# Altium PCB Motherboard.PcbDoc (part 1 of 2)
Units mil, origin at the board's own origin, x right, y up, seen from the top; angles counter-clockwise.
Board outline 12000 x 6000 mil, 2 copper layers (Top Layer, Bottom Layer); 292 components, 245 nets, 1024 pads, 7 vias.
Unrouted connection lines stored in the file: 549.
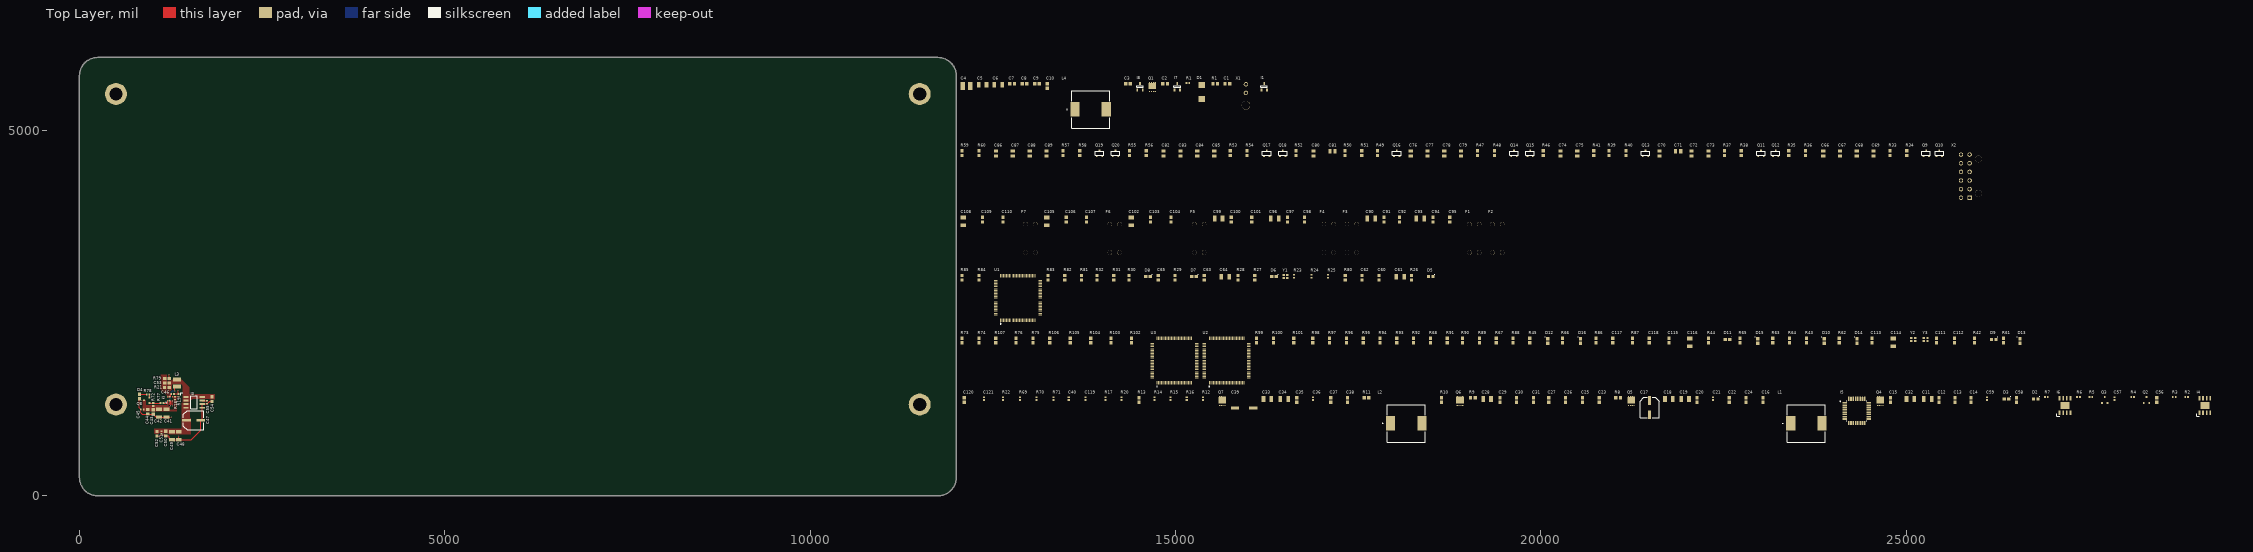
[diagram p0: Top Layer view]
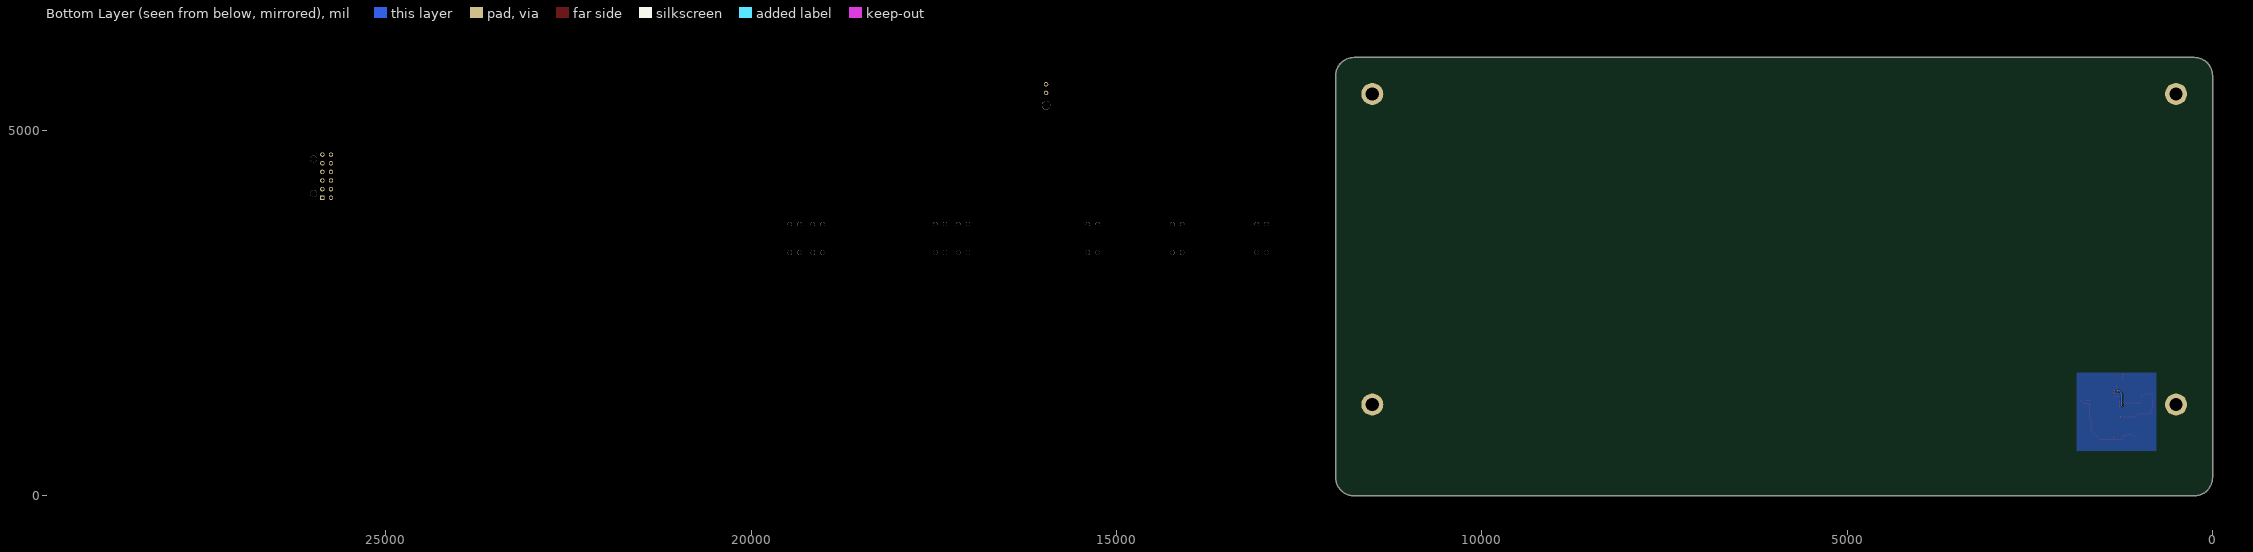
[diagram p1: Bottom Layer view, seen from below]

## Layer stack, top to bottom
Top Solder: solder mask 0.4, Solder Resist, Dk 3.5
Top Layer: signal copper 1.4
Dielectric 1: dielectric 12.6, FR-4, Dk 4.8
Bottom Layer: signal copper 1.4
Bottom Solder: solder mask 0.4, Solder Resist, Dk 3.5

## Board outline
0,250 0,5750 cw(c250,5750) 250,6000 11750,6000 cw(c11750,5750) 12000,5750 12000,250 cw(c11750,250) 11750,0 250,0 cw(c250,250)

## Design rules (kind name [scope] priority, off if disabled: settings)
Clearance [All] p1: gap=10 ignorepadtopadclearanceinfootprint=FALSE except(0: Arc-Hole Track-Hole SMDPad-Hole THPad-Hole Via-Hole Fill-Hole Poly-Hole Region-Hole Text-Hole)
PolygonConnect [All] p1: connectstyle=Direct reliefconductorwidth=10 reliefentries=4 polygonreliefangle="90 Angle" airgapwidth=10
RoomDefinition 3.3V_Converter [False] p1: confinementstyle=ConfineIn formatcopy=TRUE lockcomponents=FALSE outline 735,1725 1905,1725 1905,585 735,585
RoomDefinition Power_Section [InComponentClass('Power_Section')] p2: confinementstyle=ConfineIn formatcopy=TRUE lockcomponents=FALSE outline 12045,4905 16275,4905 16275,5775 12045,5775
RoomDefinition Mosfet_Board [InComponentClass('Mosfet_Board')] p3: confinementstyle=ConfineIn formatcopy=TRUE lockcomponents=FALSE outline 12045,3995 26105,3995 26105,4855 12045,4855
RoomDefinition FuseCircuit [InComponentClass('FuseCircuit')] p4: confinementstyle=ConfineIn formatcopy=TRUE lockcomponents=FALSE outline 12045,3205 19545,3205 19545,3945 12045,3945
RoomDefinition Fuse_Science_PDB_MCU [InComponentClass('Fuse_Science_PDB_MCU')] p5: confinementstyle=ConfineIn formatcopy=TRUE lockcomponents=FALSE outline 12045,2340 18565,2340 18565,3150 12045,3150
RoomDefinition Brushed_Motor_MCU [InComponentClass('Brushed_Motor_MCU')] p6: confinementstyle=ConfineIn formatcopy=TRUE lockcomponents=FALSE outline 12045,1480 26700,1480 26700,2290 12045,2290
RoomDefinition 5V_12V_Converter [InComponentClass('5V_12V_Converter')] p7: confinementstyle=ConfineIn formatcopy=TRUE lockcomponents=FALSE outline 12075,606.5 29195,606.5 29195,1476.5 12075,1476.5
RoutingVias [All] p1: holewidth=28 width=50 viastyle="Through Hole" minholewidth=28 minwidth=50 maxholewidth=28 maxwidth=50
SolderMaskExpansion [All] p1: expansion=4 istentingtop=FALSE
Width [All] p1: maxlimit=10 minlimit=5 preferedwidth=10 bottomlayer_minwidth=10 minimp=50.000000 maximp=50.000000 favimp=50.000000
30 further rules are at their usual default settings.

## Classes and differential pairs
component class Power_Section: C1 C2 C3 C4 C5 C6 C7 C8 C9 C10 D1 I1 I7 I8 L4 Q1 R1 X1
component class Mosfet_Board: C66 C67 C68 C69 C70 C71 C72 C73 C74 C75 C76 C77 C78 C79 C80 C81 C82 C83 C84 C85 C86 C87 C88 C89 Q9 Q10 Q11 Q12 Q13 Q14 Q15 Q16 Q17 Q18 Q19 Q20 R33 R34 R35 R36 R37 R38 R39 R40 R41 R46 R47 R48 R49 R50 R51 R52 R53 R54 R55 R56 R57 R58 R59 R60 X2
component class FuseCircuit: C90 C91 C92 C93 C94 C95 C96 C97 C98 C99 C100 C101 C102 C103 C104 C105 C106 C107 C108 C109 C110 F1 F2 F3 F4 F5 F6 F7
component class Fuse_Science_PDB_MCU: C60 C61 C62 C63 C64 C65 D5 D6 D7 D8 R23 R24 R25 R26 R27 R28 R29 R30 R31 R32 R80 R81 R82 R83 R84 R85 U1 Y1
component class Brushed_Motor_MCU: C111 C112 C113 C114 C115 C116 C117 C118 D9 D10 D11 D12 D13 D14 D15 D16 R42 R43 R44 R45 R61 R62 R63 R64 R65 R66 R67 R68 R73 R74 R75 R76 R86 R87 R88 R89 R90 R91 R92 R93 R94 R95 R96 R97 R98 R99 R100 R101 R102 R103 R104 R105 R106 R107 U2 U3 Y2 Y3
component class 5V_12V_Converter: C11 C12 C13 C14 C15 C16 C17 C18 C19 C20 C21 C22 C23 C24 C25 C26 C27 C28 C29 C30 C31 C32 C33 C34 C35 C36 C37 C38 C39 C40 C56 C57 C58 C59 C119 C120 C121 D2 D3 I4 I5 I6 L1 L2 Q2 Q3 Q4 Q5 Q6 Q7 R2 R3 R4 R5 R6 R7 R8 R9 R10 R11 R12 R13 R14 R15 R16 R17 R20 R22 R69 R70 R71
component class 3.3V_Converter: C41 C42 C43 C44 C45 C46 C47 C48 C49 C50 C51 C52 C53 C54 C55 D4 I2 I3 L3 Q8 R18 R19 R21 R72 R77 R78 R79

## Components (designator, comment, footprint, x,y, rotation, side; value= is the part's Value field where it differs from the comment)
C1 "UMK107AB7105KA-T" CAP-0603 15710,5640 r0 top
C2 "UMK107AB7105KA-T" CAP-0603 14860,5640 r0 top
C3 "UMK107AB7105KA-T" CAP-0603 14350,5640 r0 top
C4 "GRM32EC72A106KE05L" CAP-1210 12140,5610 r0 top
C5 "CAP-1U-0001" "CAP-1206 - duplicate" 12355,5625 r0 top
C6 "CAP-1U-0001" "CAP-1206 - duplicate" 12570,5625 r0 top
C7 "CC0603KRX7R0BB104" CAP-0603 12765,5640 r0 top
C8 "C1608C0G2A103J080AC" CAP-0603 12935,5640 r0 top
C9 "CAP-1N-0001" CAP-0603 13105,5640 r0 top
C10 "CC0603CRNPO0BN4R7" CAP-0603 13245,5610 r90 top
C11 "CAP-1U-0001" "CAP-1206 - duplicate" 25290,1326.5 r0 top
C12 "CC0603KRX7R0BB104" CAP-0603 25450,1311.5 r90 top
C13 "C1608C0G2A103J080AC" CAP-0603 25670,1311.5 r90 top
C14 "CAP-1N-0001" CAP-0603 25890,1311.5 r90 top
C15 "TMK107BBJ475KA-T" CAP-0603 24785,1311.5 r90 top
C16 "CC0603KRX7R9BB333" CAP-0603 23040,1311.5 r90 top
C17 "UUD1C221MCL1GS" ELEC-220U-0001 21490,1206.5 r0 top
C18 "CL31B106KBHNNNE" CAP-1206 21755,1326.5 r0 top
C19 "CL31B106KBHNNNE" CAP-1206 21975,1326.5 r0 top
C20 "CC0603KRX7R0BB104" CAP-0603 22140,1311.5 r90 top
C21 "CC0402KRX7R0BB103" CAP-0402 22360,1331.5 r90 top
C22 "CAP-1N-0001" CAP-0603 22580,1311.5 r90 top
C23 "CC0603KRX7R0BB104" CAP-0603 20800,1311.5 r90 top
C24 "CC0603KRX7R0BB104" CAP-0603 22810,1311.5 r90 top
C25 "CC0603KRX7R9BB333" CAP-0603 20570,1311.5 r90 top
C26 "CC0603KRX7R0BB104" CAP-0603 20340,1311.5 r90 top
C27 "CC0603KRX7R0BB104" CAP-0603 20110,1311.5 r90 top
C28 "CAP-1U-0001" "CAP-1206 - duplicate" 19260,1326.5 r0 top
C29 "CC0603KRX7R0BB104" CAP-0603 19440,1311.5 r90 top
C30 "C1608C0G2A103J080AC" CAP-0603 19670,1311.5 r90 top
C31 "CAP-1N-0001" CAP-0603 19900,1311.5 r90 top
C32 "CAP-1U-0001" "CAP-1206 - duplicate" 25055,1326.5 r0 top
C33 "CL31B106KBHNNNE" CAP-1206 16260,1326.5 r0 top
C34 "CL31B106KBHNNNE" CAP-1206 16490,1326.5 r0 top
C35 "CC0603KRX7R0BB104" CAP-0603 16660,1311.5 r90 top
C36 "CC0402KRX7R0BB103" CAP-0402 16885,1331.5 r90 top
C37 "CAP-1N-0001" CAP-0603 17125,1311.5 r90 top
C38 "CC0603KRX7R0BB104" CAP-0603 17355,1311.5 r90 top
C39 "25THV220M8X10.5" ELEC-220U-0002 15940,1201.5 r0 top
C40 "CC0402BRNPO9BN2R0" CAP-0402 13540,1331.5 r90 top
C41 "CL31B106KBHNNNE" CAP-1206 1190,1129.13 r270 top
C42 "CL31B106KBHNNNE" CAP-1206 1090,1129.13 r270 top
C43 "CC0603KRX7R0BB104" CAP-0603 1010,1148.5 r270 top
C44 "C1608C0G2A103J080AC" CAP-0603 935,1151.5 r270 top
C45 "CC0402KPX7R9BB102" CAP-0402 860.32,1185 r180 top
C46 "CC0402KRX7R0BB103" CAP-0402 1274.68,1395 r0 top
C47 "UUD1C221MCL1GS" ELEC-220U-0001 1563.43,1035 r90 top
C48 "CL31B106KBHNNNE" CAP-1206 1360,824.13 r270 top
C49 "CL31B106KBHNNNE" CAP-1206 1265,824.13 r270 top
C50 "CC0603KRX7R0BB104" CAP-0603 1180,851.5 r270 top
C51 "CC0402KRX7R0BB103" CAP-0402 1125,864.68 r270 top
C52 "CAP-1N-0001" CAP-0603 1060,850 r270 top
C53 "0603N100J500CT" CAP-0603 1198.5,1545 r0 top
C54 "CC0603KRX7R0BB104" CAP-0603 1815,1323.5 r270 top
C55 "CC0402KPX7R9BB102" CAP-0402 1745,1280.32 r270 top
C56 "UMK107AB7105KA-T" CAP-0603 28430,1311.5 r90 top
C57 "CC0402KPX7R9BB102" CAP-0402 27850,1331.5 r90 top
C58 "UMK107AB7105KA-T" CAP-0603 26510,1311.5 r90 top
C59 "CC0402KPX7R9BB102" CAP-0402 26105,1331.5 r90 top
C60 "C1608C0G2A103J080AC" CAP-0603 17785,2985 r90 top
C61 "CAP-1U-0001" "CAP-1206 - duplicate" 18070,3000 r0 top
C62 "CC0603DRNPO9BN8R0" CAP-0603 17555,2985 r90 top
C63 "C1608C0G2A103J080AC" CAP-0603 15395,2985 r90 top
C64 "CAP-1U-0001" "CAP-1206 - duplicate" 15675,3000 r0 top
C65 "CC0603DRNPO9BN8R0" CAP-0603 14765,2985 r90 top
C66 "MCS1802GS-20-Z" CAP-0805 23865,4685 r90 top
C67 "MCS1802GS-20-Z" CAP-0805 24095,4685 r90 top
C68 "MCS1802GS-20-Z" CAP-0805 24325,4685 r90 top
C69 "MCS1802GS-20-Z" CAP-0805 24555,4685 r90 top
C70 "MCS1802GS-20-Z" CAP-0805 21625,4685 r90 top
C71 "MCS1802GS-20-Z" CAP-0805 21880,4715 r0 top
C72 "MCS1802GS-20-Z" CAP-0805 22065,4685 r90 top
C73 "MCS1802GS-20-Z" CAP-0805 22295,4685 r90 top
C74 "MCS1802GS-20-Z" CAP-0805 20270,4685 r90 top
C75 "MCS1802GS-20-Z" CAP-0805 20500,4685 r90 top
C76 "MCS1802GS-20-Z" CAP-0805 18220,4685 r90 top
C77 "MCS1802GS-20-Z" CAP-0805 18450,4685 r90 top
C78 "MCS1802GS-20-Z" CAP-0805 18680,4685 r90 top
C79 "MCS1802GS-20-Z" CAP-0805 18910,4685 r90 top
C80 "MCS1802GS-20-Z" CAP-0805 16890,4685 r90 top
C81 "MCS1802GS-20-Z" CAP-0805 17150,4715 r0 top
C82 "MCS1802GS-20-Z" CAP-0805 14835,4685 r90 top
C83 "MCS1802GS-20-Z" CAP-0805 15070,4685 r90 top
C84 "MCS1802GS-20-Z" CAP-0805 15300,4685 r90 top
C85 "MCS1802GS-20-Z" CAP-0805 15530,4685 r90 top
C86 "MCS1802GS-20-Z" CAP-0805 12545,4685 r90 top
C87 "MCS1802GS-20-Z" CAP-0805 12775,4685 r90 top
C88 "MCS1802GS-20-Z" CAP-0805 13005,4685 r90 top
C89 "MCS1802GS-20-Z" CAP-0805 13235,4685 r90 top
C90 "CL31B105KCHNNNE" "CAP-1206 - duplicate" 17675,3795 r0 top
C91 "CC0603KRX7R0BB104" CAP-0603 17855,3780 r90 top
C92 "C1608C0G2A103J080AC" CAP-0603 18065,3780 r90 top
C93 "CL31B105KCHNNNE" "CAP-1206 - duplicate" 18345,3795 r0 top
C94 "CC0603KRX7R0BB104" CAP-0603 18525,3780 r90 top
C95 "C1608C0G2A103J080AC" CAP-0603 18755,3780 r90 top
C96 "CL31B105KCHNNNE" "CAP-1206 - duplicate" 16355,3795 r0 top
C97 "CC0603KRX7R0BB104" CAP-0603 16535,3780 r90 top
C98 "C1608C0G2A103J080AC" CAP-0603 16765,3780 r90 top
C99 "CL31B105KCHNNNE" "CAP-1206 - duplicate" 15585,3795 r0 top
C100 "CC0603KRX7R0BB104" CAP-0603 15765,3780 r90 top
C101 "C1608C0G2A103J080AC" CAP-0603 16045,3780 r90 top
C102 "CL31B105KCHNNNE" "CAP-1206 - duplicate" 14395,3750 r90 top
C103 "CC0603KRX7R0BB104" CAP-0603 14660,3780 r90 top
C104 "C1608C0G2A103J080AC" CAP-0603 14940,3780 r90 top
C105 "CL31B105KCHNNNE" "CAP-1206 - duplicate" 13240,3750 r90 top
C106 "CC0603KRX7R0BB104" CAP-0603 13505,3780 r90 top
C107 "C1608C0G2A103J080AC" CAP-0603 13785,3780 r90 top
C108 "CL31B105KCHNNNE" "CAP-1206 - duplicate" 12095,3750 r90 top
C109 "CC0603KRX7R0BB104" CAP-0603 12360,3780 r90 top
C110 "C1608C0G2A103J080AC" CAP-0603 12640,3780 r90 top
C111 "CC0603DRNPO9BN8R0" CAP-0603 25415,2125 r90 top
C112 "CC0603DRNPO9BN8R0" CAP-0603 25665,2125 r90 top
C113 "C1608C0G2A103J080AC" CAP-0603 24535,2125 r90 top
C114 "CAP-1U-0001" "CAP-1206 - duplicate" 24825,2095 r90 top
C115 "C1608C0G2A103J080AC" CAP-0603 21755,2125 r90 top
C116 "CAP-1U-0001" "CAP-1206 - duplicate" 22040,2095 r90 top
C117 "CC0603DRNPO9BN8R0" CAP-0603 20985,2125 r90 top
C118 "CC0603DRNPO9BN8R0" CAP-0603 21485,2125 r90 top
C119 "CC0402BRNPO9BN2R0" CAP-0402 13770,1331.5 r90 top
C120 "06035A4R7DAT2A" CAP-0603 12110,1311.5 r90 top
C121 "GRM1557U1A302JA01D" CAP-0402 12380,1331.5 r90 top
D1 "SMBJE43CAH" "DO-214AA (SMBJ)" 15360,5525 r90 top
D2 "150060AS75000" LED-0603 26775,1326.5 r0 top
D3 "150060AS75000" LED-0603 26375,1326.5 r0 top
D4 "150060AS75000" LED-0603 820,1360 r270 top
D5 "150060AS75000" LED-0603 18495,3000 r0 top
D6 "150060AS75000" LED-0603 16350,3000 r0 top
D7 "150060AS75000" LED-0603 15255,3000 r0 top
D8 "150060AS75000" LED-0603 14625,3000 r0 top
D9 "150060AS75000" LED-0603 26200,2140 r0 top
D10 "150060AS75000" LED-0603 23880,2120 r90 top
D11 "150060AS75000" LED-0603 22555,2140 r0 top
D12 "150060AS75000" LED-0603 20095,2120 r90 top
D13 "150060AS75000" LED-0603 26560,2120 r90 top
D14 "150060AS75000" LED-0603 24330,2120 r90 top
D15 "150060AS75000" LED-0603 22970,2120 r90 top
D16 "150060AS75000" LED-0603 20545,2120 r90 top
F1 "3568" FUSE-ATM-0001 19090,3525 r90 top
F2 "3568" FUSE-ATM-0001 19405,3525 r90 top
F3 "3568" FUSE-ATM-0001 17415,3525 r90 top
F4 "3568" FUSE-ATM-0001 17100,3525 r90 top
F5 "3568" FUSE-ATM-0001 15325,3525 r90 top
F6 "3568" FUSE-ATM-0001 14170,3525 r90 top
F7 "3568" FUSE-ATM-0001 13015,3525 r90 top
I1 "MCP9701T-E/TT" IC-TEMP-0001 16215,5600 r0 top
I2 "MP2182GTL-P" IC-SOT583 1240.63,1327.44 r0 top
I3 "ACS722LLCTR-10AU-T" IC-CURRENT-0001 1570.24,1280 r270 top
I4 "MCS1802GS-20-Z" IC-BUCK-8SOIC 29090,1236.5 r0 top
I5 "MAX17559ACJ+" IC-BUCK-TQFP-7x7 24325,1161.5 r0 top
I6 "MCS1802GS-20-Z" IC-BUCK-8SOIC 27175,1236.5 r0 top
I7 "MCP9701T-E/TT" IC-TEMP-0001 15025,5600 r0 top
I8 "MCP9701T-E/TT" IC-TEMP-0001 14515,5600 r0 top
L1 "SRP1265A-3R3M" PWRIND-3.3U-0002 23635,991.5 r0 top
L2 "SRP1265A-1R5M" PWRIND-1.5U-0002 18160,991.5 r0 top
L3 "SRP3212-1R5M" IND-1210 1335,1497.48 r90 top
L4 "SRP1265A-1R5M" PWRIND-1.5U-0002 13840,5290 r0 top
Q1 "TPN11006PL,LQ" NMOS-8TSON 14685,5595 r0 top
Q2 "BC847C,235" NPN-420-0001 28290,1311.5 r0 top
Q3 "BC847C,235" NPN-420-0001 27720,1311.5 r0 top
Q4 "TPN11006PL,LQ" NMOS-8TSON 24645,1296.5 r0 top
Q5 "TPN11006PL,LQ" NMOS-8TSON 21240,1296.5 r0 top
Q6 "TPN11006PL,LQ" NMOS-8TSON 18895,1296.5 r0 top
Q7 "TPN11006PL,LQ" NMOS-8TSON 15640,1296.5 r0 top
Q8 "BC847C,235" NPN-420-0001 920.63,1307.4 r90 top
Q9 "YJL3404A" NMOS-SOT23-3 25275,4690 r0 top
Q10 "YJL3404A" NMOS-SOT23-3 25455,4690 r0 top
Q11 "YJL3404A" NMOS-SOT23-3 23015,4690 r0 top
Q12 "YJL3404A" NMOS-SOT23-3 23215,4690 r0 top
Q13 "YJL3404A" NMOS-SOT23-3 21435,4690 r0 top
Q14 "YJL3404A" NMOS-SOT23-3 19635,4690 r0 top
Q15 "YJL3404A" NMOS-SOT23-3 19855,4690 r0 top
Q16 "YJL3404A" NMOS-SOT23-3 18030,4690 r0 top
Q17 "YJL3404A" NMOS-SOT23-3 16250,4690 r0 top
Q18 "YJL3404A" NMOS-SOT23-3 16470,4690 r0 top
Q19 "YJL3404A" NMOS-SOT23-3 13960,4690 r0 top
Q20 "YJL3404A" NMOS-SOT23-3 14180,4690 r0 top
R1 "ERJ-3EKF2003V" RES-0603 15545,5640 r0 top
R1 "AF0402FR-07100KL" RES-0402 15170,5650 r0 top
R2 "RC0402FR-0710KL" RES-0402 28840,1351.5 r0 top
R3 "RC0402FR-0710KL" RES-0402 28670,1351.5 r0 top
R4 "RC0402JR-071KP" RES-0402 28100,1351.5 r0 top
R5 "RC0402JR-071KP" RES-0402 27530,1351.5 r0 top
R6 "AC0402FR-07220RL" RES-0402 27360,1351.5 r0 top
R7 "AC0402FR-07220RL" RES-0402 26920,1351.5 r0 top
R8 "ARG03FTC5761" RES-0603 21060,1341.5 r0 top
R9 "RC0603FR-07121KL" RES-0603 19070,1341.5 r0 top
R10 "RC0603FR-07165KL" RES-0603 18640,1311.5 r90 top
R11 "RC0603FR-07240KL" RES-0603 17615,1341.5 r0 top
R12 "AC0402FR-075K6L" RES-0402 15375,1331.5 r90 top
R13 "RC0603FR-0710KP" RES-0603 14500,1311.5 r90 top
R14 "AF0402FR-07100KL" RES-0402 14715,1331.5 r90 top
R15 "RC0402FR-0710KL" RES-0402 14935,1331.5 r90 top
R16 "RC0402FR-0710KL" RES-0402 15155,1331.5 r90 top
R17 "RMCF0402FT78K7" RES-0402 14040,1331.5 r90 top
R18 "RC0402JR-071KP" RES-0402 1310,1335.32 r90 top
R19 "RC0402JR-071KP" RES-0402 1355,1374.68 r90 top
R20 "RMCF0402JT75K0" RES-0402 14260,1331.5 r90 top
R21 "ERJ-3EKF2003V" RES-0603 1196.5,1485 r180 top
R22 "RC0402FR-072KP" RES-0402 12640,1331.5 r90 top
R23 "RC0402FR-0710KL" RES-0402 16625,3005 r90 top
R24 "RC0402FR-0710KL" RES-0402 16860,3005 r90 top
R25 "RC0402FR-0710KL" RES-0402 17090,3005 r90 top
R26 "AC0603FR-10100RL" RES-0603 18230,2985 r90 top
R27 "AC0603FR-10100RL" RES-0603 16085,2985 r90 top
R28 "RMCF0603FT1M00" RES-0603 15855,2985 r90 top
R29 "AC0603FR-10100RL" RES-0603 14995,2985 r90 top
R30 "AC0603FR-10100RL" RES-0603 14365,2985 r90 top
R31 "AF0603FR-074K7L" RES-0603 14155,2985 r90 top
R32 "AF0603FR-074K7L" RES-0603 13925,2985 r90 top
R33 "RC0603FR-0733RP" RES-0603 24780,4690 r90 top
R34 "RC0603FR-0733RP" RES-0603 25010,4690 r90 top
R35 "RC0603FR-0710KP" RES-0603 23395,4690 r90 top
R36 "RC0603FR-0710KP" RES-0603 23625,4690 r90 top
R37 "RC0603FR-0733RP" RES-0603 22515,4690 r90 top
R38 "RC0603FR-0733RP" RES-0603 22745,4690 r90 top
R39 "RC0603FR-0710KP" RES-0603 20935,4690 r90 top
R40 "RC0603FR-0710KP" RES-0603 21165,4690 r90 top
R41 "RC0603FR-0733RP" RES-0603 20725,4690 r90 top
R42 "AC0603FR-10100RL" RES-0603 25935,2125 r90 top
R43 "AC0603FR-10100RL" RES-0603 23635,2125 r90 top
R44 "AC0603FR-10100RL" RES-0603 22295,2125 r90 top
R45 "AC0603FR-10100RL" RES-0603 19850,2125 r90 top
R46 "RC0603FR-0710KP" RES-0603 20035,4690 r90 top
R47 "RC0603FR-0733RP" RES-0603 19135,4690 r90 top
R48 "RC0603FR-0733RP" RES-0603 19365,4690 r90 top
R49 "RC0603FR-0733RP" RES-0603 17765,4690 r90 top
R50 "RC0603FR-0710KP" RES-0603 17320,4690 r90 top
R51 "RC0603FR-0710KP" RES-0603 17550,4690 r90 top
R52 "RC0603FR-0710KP" RES-0603 16650,4690 r90 top
R53 "RC0603FR-0733RP" RES-0603 15750,4690 r90 top
R54 "RC0603FR-0733RP" RES-0603 15980,4690 r90 top
R55 "RC0603FR-0710KP" RES-0603 14370,4690 r90 top
R56 "RC0603FR-0710KP" RES-0603 14600,4690 r90 top
R57 "RC0603FR-0733RP" RES-0603 13460,4690 r90 top
R58 "RC0603FR-0733RP" RES-0603 13690,4690 r90 top
R59 "RC0603FR-0710KP" RES-0603 12080,4690 r90 top
R60 "RC0603FR-0710KP" RES-0603 12310,4690 r90 top
R61 "AC0603FR-10100RL" RES-0603 26335,2125 r90 top
R62 "AC0603FR-10100RL" RES-0603 24085,2125 r90 top
R63 "RMCF0603FT1M00" RES-0603 23175,2125 r90 top
R64 "RMCF0603FT1M00" RES-0603 23405,2125 r90 top
R65 "AC0603FR-10100RL" RES-0603 22725,2125 r90 top
R66 "AC0603FR-10100RL" RES-0603 20300,2125 r90 top
R67 "RMCF0603ZT0R00" RES-0603 19390,2125 r90 top
R68 "RMCF0603ZT0R00" RES-0603 18490,2125 r90 top
R69 "CRCW04027K15FKED" RES-0402 12870,1331.5 r90 top
R70 "RC0402JR-071KP" RES-0402 13100,1331.5 r90 top
R71 "RC0402JR-071KP" RES-0402 13330,1331.5 r90 top
R72 "AF0402FR-07100KL" RES-0402 1010,1250 r90 top
R73 "AF0603FR-074K7L" RES-0603 12080,2125 r90 top
R74 "AF0603FR-074K7L" RES-0603 12310,2125 r90 top
R75 "AF0603FR-074K7L" RES-0603 13050,2125 r90 top
R76 "AF0603FR-074K7L" RES-0603 12820,2125 r90 top
R77 "RC0402FR-0710KL" RES-0402 1130,1270 r180 top
R78 "RC0402JR-0733RP" RES-0402 940.32,1390 r180 top
R79 "RMCF0603FT44K2" RES-0603 1198.5,1605 r0 top
R80 "RMCF0603ZT0R00" RES-0603 17325,2985 r90 top
R81 "RMCF0603ZT0R00" RES-0603 13715,2985 r90 top
R82 "RMCF0603ZT0R00" RES-0603 13485,2985 r90 top
R83 "RMCF0603ZT0R00" RES-0603 13255,2985 r90 top
R84 "RMCF0603ZT0R00" RES-0603 12310,2985 r90 top
R85 "RMCF0603ZT0R00" RES-0603 12080,2985 r90 top
R86 "RMCF0603ZT0R00" RES-0603 20755,2125 r90 top
R87 "RMCF0603ZT0R00" RES-0603 21255,2125 r90 top
R88 "AF0603FR-074K7L" RES-0603 19620,2125 r90 top
R89 "AF0603FR-074K7L" RES-0603 19160,2125 r90 top
R90 "AF0603FR-074K7L" RES-0603 18930,2125 r90 top
R91 "AF0603FR-074K7L" RES-0603 18720,2125 r90 top
R92 "RMCF0603ZT0R00" RES-0603 18260,2125 r90 top
R93 "RMCF0603ZT0R00" RES-0603 18030,2125 r90 top
R94 "RMCF0603ZT0R00" RES-0603 17800,2125 r90 top
R95 "RMCF0603ZT0R00" RES-0603 17570,2125 r90 top
R96 "RMCF0603ZT0R00" RES-0603 17340,2125 r90 top
R97 "RMCF0603ZT0R00" RES-0603 17110,2125 r90 top
R98 "RMCF0603ZT0R00" RES-0603 16880,2125 r90 top
R99 "RMCF0603ZT0R00" RES-0603 16110,2125 r90 top
R100 "RMCF0603ZT0R00" RES-0603 16340,2125 r90 top
R101 "RMCF0603ZT0R00" RES-0603 16620,2125 r90 top
R102 "RMCF0603ZT0R00" RES-0603 14400,2125 r90 top
R103 "RMCF0603ZT0R00" RES-0603 14120,2125 r90 top
R104 "RMCF0603ZT0R00" RES-0603 13840,2125 r90 top
R105 "RMCF0603ZT0R00" RES-0603 13560,2125 r90 top
R106 "RMCF0603ZT0R00" RES-0603 13280,2125 r90 top
R107 "RMCF0603ZT0R00" RES-0603 12540,2125 r90 top
U1 "STM32F100VBT7B" IC-STM32F100-0001 12845,2710 r0 top
U2 "STM32F100VBT7B" IC-STM32F100-0001 15700,1850 r0 top
U3 "STM32F100VBT7B" IC-STM32F100-0001 14985,1850 r0 top
X1 "Molex - Micro-Fit 3.0 Series connector,  3.00mm (0.118\") pitch header, 2 positions." 43045-0200 15965,5345 r0 top
X2 "Molex - Micro-Fit 3.0 Series connector,  3.00mm (0.118\") pitch header, 12 positions." 44764-1201 25870,4375 r90 top
Y1 "ECS-240-6-37B-7KM-TR" CRYSTAL-4-SMD-0001 16480,2980 r0 top
Y2 "ECS-240-6-37B-7KM-TR" CRYSTAL-4-SMD-0001 25070,2120 r0 top
Y3 "ECS-240-6-37B-7KM-TR" CRYSTAL-4-SMD-0001 25240,2120 r0 top

## Footprints (in the part's own frame and the unit in brackets; to place one, negate y for a bottom-side part, rotate by r counter-clockwise, add the part's x,y. Pads: shape width x height; smd on the part's side, far side on the other; paste and mask are expansions set on the pad)
43045-0200 [mm]
  round 3 hole 3 unplated: 1(0,0)
  round 1.53 / inner round 1.524 / far side round 1.53 hole 1.02: P$1(0,4.32) P$2(0,7.32)
44764-1201 [mm]
  round 2.36 hole 2.36 unplated: 1(-6,-3.05) 1(6,-3.05)
  rect 1.482x1.482 / inner rect 1.524x1.524 / far side rect 1.482x1.482 hole 1.02: P$1(-7.5,0)
  round 1.53 / inner round 1.524 / far side round 1.53 hole 1.02: P$2(-4.5,0) P$3(-1.5,0) P$4(1.5,0) P$5(4.5,0) P$6(7.5,0) P$7(-7.5,3) P$8(-4.5,3) P$9(-1.5,3) P$10(1.5,3) P$11(4.5,3) P$12(7.5,3)
CAP-0402 [mm]
  rect 0.6x0.7 smd: 1(-0.5,0) 2(0.5,0)
  body extent -0.5,-0.22 0.5,0.23, height 0.5
CAP-0603 [mm]
  rect 1.15x1.1 smd: 1(-0.8,0) 2(0.8,0)
  body extent -0.8,-0.45 0.8,0.45, height 0.8
CAP-0805 [mm]
  rect 1.16x1.47 smd: 1(-0.88,0) 2(0.88,0)
  body extent -1,-0.63 1,0.63, height 0.94
CAP-1206 [mm]
  rect 1.25x2 smd: 1(-1.375,0) 2(1.375,0)
  body extent -1.6,-0.8 1.6,0.8, height 1.5
"CAP-1206 - duplicate" [mm]
  rect 1.25x2 smd: 1(-1.248,0) 2(1.502,0)
  body extent -1.47,-0.8 1.73,0.8, height 1.5
CAP-1210 [mm]
  rect 1.53x2.72 smd: 1(-1.341,0) 2(1.341,0)
  body extent -1.6,-1.25 1.6,1.25, height 2.7
CRYSTAL-4-SMD-0001 [mm]
  rect 0.85x0.75 smd: 1(0,0) 2(0,1.05) 2(1.35,0) 3(1.35,1.05)
  body extent -0.33,-0.28 1.68,1.33, height 0.5
"DO-214AA (SMBJ)" [mm]
  rect 2.16x2.26 smd: 1(-2.416,0) 2(2.484,0)
  body extent -2.72,-1.95 2.78,1.95, height 2.45
ELEC-220U-0001 [mm]
  rect 1x3 smd: 1(0,2.5) 2(0,-2.5)
  silkscreen extent -3.3,-3.56 3.3,3.56, body extent -3.3,-3.5 3.3,3.5, height 7.95
ELEC-220U-0002 [mm]
  rect 2.9x1 smd: 1(-3.15,0) 2(3.15,0)
  body extent -4.44,-4.25 4.44,4.25, height 10.54
FUSE-ATM-0001 [mm]
  round 1.524 hole 1.6: 1(-4.95,-1.7) 1(-4.95,1.7) 2(4.95,-1.7) 2(4.95,1.7)
  body extent -8,-3.37 8,3.37, height 7.37
IC-BUCK-8SOIC [mm]
  rect 0.6x1.5 smd: 1(-1.905,-2.5) 2(-0.635,-2.5) 3(0.635,-2.5) 4(1.905,-2.5) 5(1.905,2.5) 6(0.635,2.5) 7(-0.635,2.5) 8(-1.905,2.5)
  rect 3.2x2.4 smd: 9(0,0)
  silkscreen extent -2.92,-3.81 -1.91,-2.79, body extent -2.45,-3 2.45,3, height 1.75
IC-BUCK-TQFP-7x7 [mm]
  rrect25% 1.56x0.55 smd: 1(-4.18,2.8) 2(-4.18,2) 3(-4.18,1.2) 4(-4.18,0.4) 5(-4.18,-0.4) 6(-4.18,-1.2) 7(-4.18,-2) 8(-4.18,-2.8) 17(4.18,-2.8) 18(4.18,-2) 19(4.18,-1.2) 20(4.18,-0.4) 21(4.18,0.4) 22(4.18,1.2) 23(4.18,2) 24(4.18,2.8)
  rrect25% 0.55x1.56 smd: 9(-2.8,-4.18) 10(-2,-4.18) 11(-1.2,-4.18) 12(-0.4,-4.18) 13(0.4,-4.18) 14(1.2,-4.18) 15(2,-4.18) 16(2.8,-4.18) 25(2.8,4.18) 26(2,4.18) 27(1.2,4.18) 28(0.4,4.18) 29(-0.4,4.18) 30(-1.2,4.18) 31(-2,4.18) 32(-2.8,4.18)
  silkscreen extent -5.84,-3.5 3.5,3.5, body extent -4.5,-4.5 4.5,4.5, height 1.2
IC-CURRENT-0001 [mm]
  rect 0.65x1.75 smd: 1(-1.905,-2.8) 2(-0.635,-2.8) 3(0.635,-2.8) 4(1.905,-2.8) 5(1.905,2.8) 6(0.635,2.8) 7(-0.635,2.8) 8(-1.905,2.8)
  silkscreen extent -3.3,-4.65 2.29,1.14
IC-SOT583 [mm]
  rect 0.25x0.6 smd: 1(-0.762,-0.7) 2(-0.262,-0.7) 3(0.238,-0.7) 4(0.738,-0.7) 5(0.738,0.7) 6(0.238,0.7) 7(-0.262,0.7) 8(-0.762,0.7)
  silkscreen extent -1.4,-1.4 -1.02,-1.02, body extent -1.11,-0.85 1.11,0.85, height 0.56
IC-STM32F100-0001 [mm] "STM32F100VBT7b"
  rect 0.3x1.2 smd: 1(-6,-7.75) 2(-5.5,-7.75) 3(-5,-7.75) 4(-4.5,-7.75) 5(-4,-7.75) 6(-3.5,-7.75) 7(-3,-7.75) 8(-2.5,-7.75) 9(-2,-7.75) 10(-1.5,-7.75) 11(-1,-7.75) 12(-0.5,-7.75) 13(0,-7.75) 14(0.5,-7.75) 15(1,-7.75) 16(1.5,-7.75) 17(2,-7.75) 18(2.5,-7.75) 19(3,-7.75) 20(3.5,-7.75) 21(4,-7.75) 22(4.5,-7.75) 23(5,-7.75) 24(5.5,-7.75) 25(6,-7.75) 51(6,7.75) 52(5.5,7.75) 53(5,7.75) 54(4.5,7.75) 55(4,7.75) 56(3.5,7.75) 57(3,7.75) 58(2.5,7.75) 59(2,7.75) 60(1.5,7.75) 61(1,7.75) 62(0.5,7.75) 63(0,7.75) 64(-0.5,7.75) 65(-1,7.75) 66(-1.5,7.75) 67(-2,7.75) 68(-2.5,7.75) 69(-3,7.75) 70(-3.5,7.75) 71(-4,7.75) 72(-4.5,7.75) 73(-5,7.75) 74(-5.5,7.75) 75(-6,7.75)
  rect 1.2x0.3 smd: 26(7.75,-6) 27(7.75,-5.5) 28(7.75,-5) 29(7.75,-4.5) 30(7.75,-4) 31(7.75,-3.5) 32(7.75,-3) 33(7.75,-2.5) 34(7.75,-2) 35(7.75,-1.5) 36(7.75,-1) 37(7.75,-0.5) 38(7.75,0) 39(7.75,0.5) 40(7.75,1) 41(7.75,1.5) 42(7.75,2) 43(7.75,2.5) 44(7.75,3) 45(7.75,3.5) 46(7.75,4) 47(7.75,4.5) 48(7.75,5) 49(7.75,5.5) 50(7.75,6) 76(-7.75,6) 77(-7.75,5.5) 78(-7.75,5) 79(-7.75,4.5) 80(-7.75,4) 81(-7.75,3.5) 82(-7.75,3) 83(-7.75,2.5) 84(-7.75,2) 85(-7.75,1.5) 86(-7.75,1) 87(-7.75,0.5) 88(-7.75,0) 89(-7.75,-0.5) 90(-7.75,-1) 91(-7.75,-1.5) 92(-7.75,-2) 93(-7.75,-2.5) 94(-7.75,-3) 95(-7.75,-3.5) 96(-7.75,-4) 97(-7.75,-4.5) 98(-7.75,-5) 99(-7.75,-5.5) 100(-7.75,-6)
  silkscreen extent -6.13,-9.13 -5.87,-8.87, body extent -8,-8 8,8, height 1.6
IC-TEMP-0001 [mm]
  rect 0.65x1.05 smd: 1(-0.95,-1.15) 2(0.95,-1.15) 3(0,1.15)
  silkscreen extent -1.14,-0.25 1.14,0.25
IND-1210 [mm]
  rect 1.35x2.8 smd: 1(0,0) 2(2.35,0)
  body extent -0.43,-1.25 2.77,1.25, height 1.9
LED-0603 [mm]
  rect 1.15x1.1 smd: 1(-0.8,0) 2(0.8,0)
  silkscreen extent 1.27,0.89 1.4,0.89, body extent -0.8,-0.3 0.8,0.3, height 1
NMOS-8TSON [mm]
  rect 0.4x0.4 smd: 1(0.975,-1.55) 2(-0.975,-1.55) 2(-0.325,-1.55) 2(0.325,-1.55)
  rect 0.4x0.3 smd: 3(-0.975,1.6) 3(-0.325,1.6) 3(0.325,1.6) 3(0.975,1.6)
  rect 2.65x2.2 smd: 3(0,0.35)
  body extent -1.65,-1.65 1.65,1.65, height 0.85
NMOS-SOT23-3 [mm]
  rect 0.6x0.7 smd: 1(-0.95,-1) 2(0.95,-1) 3(0,1)
  silkscreen extent -1.5,-0.7 1.5,0.7, body extent -1.46,-1.18 1.46,1.19, height 1.12
NPN-420-0001 [mm]
  rect 0.6x0.7 smd: 1(-0.95,-1) 2(0.95,-1) 3(0,1)
  body extent -1.5,-1.25 1.5,1.25, height 1.09
PWRIND-1.5U-0002 [mil]
  rect 126x199 smd paste+0 mask+0: 1(-214.59,0) 2(214.59,0)
  silkscreen extent -326,-257 261,257, body extent -276,-252 276,252, height 256
PWRIND-3.3U-0002 [mil]
  rect 126x199 smd paste+0 mask+0: 1(-214.59,0) 2(214.59,0)
  silkscreen extent -326,-257 261,257, body extent -276,-252 276,252, height 256
RES-0402 [mm]
  rect 0.6x0.7 smd: 1(-0.5,0) 2(0.5,0)
  body extent -0.5,-0.25 0.5,0.25, height 0.3
RES-0603 [mm]
  rect 1.15x1.1 smd: 1(-0.8,0) 2(0.8,0)
  body extent -0.8,-0.4 0.8,0.4, height 0.43

## Part data
C1 C2 C3 C56 C58: library part CAP-1U-0002, "1 µF ±10% 50V Ceramic Capacitor X7R 0603 (1608 Metric)", Capacitance="1 uF", Package Size=0603, Voltage=50V
C4: library part CAP-10U-0003, "10 µF ±10% 100V Ceramic Capacitor X7S 1210 (3225 Metric)", Package Size=1210, Voltage Rating=100V, Capcitance="10 uF"
C5 C6 C11 C28 C32 C61 C64 C114 C116: "1 µF ±10% 100V Ceramic Capacitor X7R 1206 (3216 Metric)", Capacitance="1 uF +/- 10%", Voltage=100V
C7 C12 C20 C23 C24 C26 C27 C29 C35 C38 C43 C50 C54 C91 C94 C97 C100 C103 C106 C109: library part CAP-100N-0001, "CAP CER 0.1UF 100V X7R 0603", Capacitance="100nF +/-10%", Manufacturer=YAGEO, Package Size=0603, Temperature Coefficient=X7R, Voltage Rating=100V, Assembled?=no, Manufacturer Part Number=CC0603KRX7R0BB104
C8 C13 C30 C44 C60 C63 C92 C95 C98 C101 C104 C107 C110 C113 C115: library part CAP-10N-0002, "CAP CER 10000PF 100V C0G 0603", Capacitance="10nF +/-5%", Manufacturer="TDK Corporation", Package Size=0603, Temperature Coefficient=C0G/NP0, Voltage Rating=100V, Assembled?=no, Manufacturer Part Number=C1608C0G2A103J080AC
C9 C14 C22 C31 C37 C52: "1000 pF ±10% 100V Ceramic Capacitor X7R 0603 (1608 Metric)", Capacitance="1 nF +/-10%", Voltage=100V
C10: library part CAP-4.7P-0002, "4.7 pF ±0.25pF 100V Ceramic Capacitor C0G, NP0 0603 (1608 Metric)", Capacitance="4.7 pF +/- 0.25 pF", Voltage=100V
C15: library part CAP-4.7U-0001, "4.7 µF ±10% 25V Ceramic Capacitor X5R 0603 (1608 Metric)", Capacitance="4.7uF +/-10%", Manufacturer="Taiyo Yuden", Package Size=0603, Temperature Coefficient=X5R, Voltage Rating=25V, Assembled?=no, Manufacturer Part Number=TMK107BBJ475KA-T
C16 C25: library part CAP-33N-0001, "0.033 µF ±10% 50V Ceramic Capacitor X7R 0603 (1608 Metric)", Capacitance="33nF +/-10%", Manufacturer=YAGEO, Package Size=0603, Temperature Coefficient=X7R, Voltage Rating=50V, Assembled?=no, Manufacturer Part Number=CC0603KRX7R9BB333
C17 C47: library part ELEC-220U-0001, "220 µF 16 V Aluminum Electrolytic Capacitors Radial, Can - SMD 2000 Hrs @ 105°C", Capacitance="220uF +/-20%", Manufacturer=Nichicon, Voltage Rating=16V, Assembled?=no, Manufacturer Part Number=UUD1C221MCL1GS
C18 C19 C33 C34 C41 C42 C48 C49: library part CAP-10U-0001, "10 µF ±10% 50V Ceramic Capacitor X7R 1206 (3216 Metric)", Capacitance="10uF +/-20%", Manufacturer="Samsung Electro-Mechanics", Package Size=1206, Temperature Coefficient=X7R, Voltage Rating=50V, Assembled?=no, Manufacturer Part Number=CL31B106KBHNNNE
C21 C36 C46 C51: library part CAP-10N-0001, "10000 pF ±10% 100V Ceramic Capacitor X7R 0402 (1005 Metric)", Capacitance="10nF +/-10%", Manufacturer=YAGEO, Package Size=0402, Temperature Coefficient=X7R, Voltage Rating=100V, Assembled?=no, Manufacturer Part Number=CC0402KRX7R0BB103
C39: library part ELEC-220U-0002, "220 µF 25 V Aluminum Electrolytic Capacitors Radial, Can - SMD 300mOhm @ 100kHz 3000 Hrs @ 125°C", Capacitance="220 uF +/- 20%", Voltage=25V, SIze="0.327 in x 0.327 in"
C40 C119: library part CAP-2P-0001, "2 pF ±0.1pF 50V Ceramic Capacitor C0G, NP0 0402 (1005 Metric)", Capacitance="2 pF +/ 0.1 pF", Voltage=50V
C45 C55 C57 C59: library part CAP-1N-0002, "1000 pF ±10% 50V Ceramic Capacitor X7R 0402 (1005 Metric)", Capacitance="1nF +/-10%", Manufacturer=YAGEO, Package Size=0402, Temperature Coefficient=X7R, Voltage Rating=50V, Assembled?=no, Manufacturer Part Number=CC0402KPX7R9BB102
C53: library part CAP-10P-0001, "10 pF ±5% 50V Ceramic Capacitor C0G, NP0 0603 (1608 Metric)", Capacitance="10 pF +/- 5%", Manufacturer="Walshin Technology Corporation", Package Size=0603, Temperature Coefficient="C0G, NP0", Voltage Rating=50V, Assembled?=Yes, Manufacturer Part Number=0603N100J500CT
C62 C65 C111 C112 C117 C118: library part CAP-8P-0001, "8 pF ±0.5pF 50V Ceramic Capacitor C0G, NP0 0603 (1608 Metric)", Capacitance="8 pF +/- 0.5 pF", Package Size=0603, Voltage=50V
C66 C67 C68 C69 C70 C71 C72 C73 C74 C75 C76 C77 C78 C79 C80 C81 C82 C83 C84 C85 C86 C87 C88 C89: library part CAP-10U-0002, "10 µF ±10% 16V Ceramic Capacitor X7R 0805 (2012 Metric)", Capacitance="10 uF", Package Size=0805, Voltage Rating=16V
C90 C93 C96 C99 C102 C105 C108: library part CAP-1U-0001, "1 µF ±10% 100V Ceramic Capacitor X7R 1206 (3216 Metric)", Capacitance="1 uF +/- 10%", Voltage=100V
C120: library part CAP-4.7P-0001, "4.7 pF ±0.5pF 50V Ceramic Capacitor C0G, NP0 0603 (1608 Metric)", Capacitance="4.7 pF +/ 0.5 pF", Manufacturer="KYOCERA AVX", Package Size=0603, Temperature Coefficient="G0G. NP0", Voltage Rating=50V, Assembled?=Yes, Manufacturer Part Number=06035A4R7DAT2A
C121: library part CAP-3N-0001, "3000 pF ±5% 10V Ceramic Capacitor U2J 0402 (1005 Metric)", Capacitance="3 nF +/ 5%", Voltagev=10V
D1: library part DIO-69.4V-0001, "69.4V Clamp 8.7A Ipp Tvs Diode Surface Mount DO-214AA (SMBJ)", Breakdown Voltage=47.8V, Package="DO-214AA (SMBJ)", Peak pulser current=8.7A, Reverse working maximum voltage=43V, Channels=Bidirectional, Vclamp=69.4V
D2 D3 D4 D5 D6 D7 D8 D9 D10 D11 D12 D13 D14 D15 D16: library part LED_Amber_0001, "CAP CER 0.1UF 100V X7R 0603", Color=Amber, Current Rating=20mA, Manufacturer="Wurth Electronik", Package Size=0603, Assembled?=no, Manufacturer Part Number=150060AS75000, Vf=2V
F1 F2 F3 F4 F5 F6 F7: library part FUSE-ATM-0001, "Fuse Holder 30 A 500V 1 Circuit Blade Through Hole", Current=30A, Voltage Rating=500V, Manufacturer Part Number=3568
I1 I7 I8: library part IC-TEMP-0001, "Temperature Sensor Analog, Local -10°C ~ 125°C 19.5mV/°C SOT-23-3", Manufacturer="Microchip Technology", Package=SOT-23-3, Assembled?=no, Manufacturer Part Number=MCP9701T-E/TT, VCC-Max=5.5V, VCC-Min=3.3V
I2: library part IC-BUCK-0003, "Buck Switching Regulator IC Positive Adjustable 0.6V 1 Output 2A SOT-583", Manufacturer="Monolithic Power Systems", Output Current-Max=2A, Package=SOT-583, Vout-Tolerance=+/-1%, Assembled?=no, Fsw=1.2MHz, Manufacturer Part Number=MP2182GTL-P, Type=Buck, VCC-Max=5.5V, VCC-Min=2.5V, Vout-Max=5.5V, Vout-Min=0.6V
I3: library part IC-CURRENT-0001, "Current Sensor 10A 1 Channel Hall Effect, Open Loop Unidirectional 8-SOIC (0.154\", 3.90mm Width)"
I4 I6: library part IC-CURRENT-0002, "Current Sensor ±20A 1 Channel Hall Effect Bidirectional 8-SOIC (0.154\", 3.90mm Width)", Manufacturer Part Number=MCS1802GS-20-Z
I5: library part IC-BUCK-0005, "Buck Regulator Positive Output Step-Down - DC-DC Controller IC 32-TQFP (7x7)", Package="TQFP-32 Maxim", Check_prices=https://www.snapeda.com/parts/MAX17559ACJ+/Maxim+Integrated/view-part/?ref=eda, Digi-Key_Part_Number=MAX17559ACJ+T-ND, MF="Maxim Integrated", MP=MAX17559ACJ+, Purchase-URL=https://pricing.snapeda.com/search/part/MAX17559ACJ+/?ref=eda, SnapEDA_Link=https://www.snapeda.com/parts/MAX17559ACJ+/Maxim+Integrated/view-part/?ref=snap
L1: library part PWRIND-3.3U-0002, "3.3 µH Shielded Drum Core, Wirewound Inductor 18 A 6.8mOhm Max Nonstandard", DC Resistance="6.8mOhm max", Inductance="3.3uH +/- 20%", Manufacturer="Bourns Electronics", Saturation Current=30A, Copyright="Copyright (C) 2022 Ultra Librarian. All rights reserved.", Dimensions=12.5x13.5x6.2, Manufacturer Part Number=SRP1265A-3R3M, Type=DEV
L2 L4: library part PWRIND-1.5U-0002, "1.5 µH Shielded Drum Core, Wirewound Inductor 27 A 3mOhm Max Nonstandard", DC Resistnace="3.0mOhm max", Inductance="1.5uH +/- 20%", Manufacturer="Bourns Electronics", Saturation Current=45A, Copyright="Copyright (C) 2022 Ultra Librarian. All rights reserved.", Dimensions=12.5x13.5x6.2, Manufacturer Part Number=SRP1265A-1R5M, Type=DEV
L3: library part PWRIND-1.5U-0001, "1.5 µH Shielded Drum Core, Wirewound Inductor 4.4 A 53mOhm Max 1210 (3225 Metric)", DC Resistance="53 mOhm", Inductance="1.5 uH +/- 20%", Manufacturer="Bourns Inc.", Package Size=1210, Saturation Current=5A, Assembled?=Yes, Manufacturer Part Number=SRP3212-1R5M
Q1 Q4 Q5 Q6 Q7: library part NMOS-26A-0001, "N-Channel 60 V 26A (Tc) 610mW (Ta), 61W (Tc) Surface Mount 8-TSON Advance (3.1x3.1)", Manufacturer=Toshiba, Package="8-TSON Advance", Assembled?=no, FET type=N-Channel, Id-Continuous=26A, Manufacturer Part Number=TPN11006PL,LQ, Rds On-Max=18.1mOhm, VDS-Max=60V, Vgs-Max=20V
Q2 Q3 Q8: library part BJT-420-0001, "Bipolar (BJT) Transistor NPN 45 V 100 mA 100MHz 250 mW Surface Mount TO-236AB", Package=TO-236AB, hFE="420 @2mA, 5V", Ic=100mA, Transistor type=NPN, VCEO=45V
Q9 Q10 Q11 Q12 Q13 Q14 Q15 Q16 Q17 Q18 Q19 Q20: library part NMOS-5.6A-0001, "N-Channel 30 V 5.6A (Ta) 1.2W (Ta) Surface Mount SOT-23", Drain Current=5.6A, Package Size=SOT23, Manufacturer Part Number=YJL3404A, Rds On="24 mOhm", Vdss=30V, Vgs(th)=2.2V
R1 R21: library part RES-200K-0001, "200 kOhms ±1% 0.1W, 1/10W Chip Resistor 0603 (1608 Metric) Automotive AEC-Q200 Thick Film", Manufacturer="Panasonic Electronic Components", Package Size=0603, Power Rating="0.1 W", Resistance="200k +/- 1%", Assembled?=Yes, MFP=ERJ-3EKF2003V
R1 R14 R72: library part RES-100K-0001, "100 kOhms ±1% 0.063W, 1/16W Chip Resistor 0402 (1005 Metric) Anti-Sulfur, Automotive AEC-Q200 Thick Film", Manufacturer=YAGEO, Package Size=0402, Power Rating=1/16W, Resistance="100kOhm +/-1%", Assembled?=no, Manufacturer Part Number=AF0402FR-07100KL
R2 R3 R15 R16 R23 R24 R25 R77: library part RES-10K-0001, "RES 10K OHM 1% 1/16W 0402", Manufacturer=YAGEO, Package Size=0402, Power Rating=1/16W, Resistance="10kOhm +/-1%", Assembled?=no, Manufacturer Part Number=RC0402FR-0710KL
R4 R5 R18 R19 R70 R71: library part RES-1K-0001, "RES SMD 1K OHM 5% 1/16W 0402", Manufacturer=YAGEO, Package Size=0402, Power Rating=1/16W, Resistance="1kOhm +/-5%", Assembled?=no, Manufacturer Part Number=RC0402JR-071KP
R6 R7: library part RES-220-0001, "220 Ohms ±1% 0.063W, 1/16W Chip Resistor 0402 (1005 Metric) Automotive AEC-Q200, Moisture Resistant Thick Film", Manufacturer=YAGEO, Package Size=0402, Power Rating=1/16W, Resistance="220Ohms +/-1%", Assembled?=no, Manufacturer Part Number=AC0402FR-07220RL
R8: library part RES-5.76K-0001, "100mW Thin Film Resistor 75V ±25ppm/℃ ±1% -55℃~+155℃ 5.76kΩ 0603 Chip Resistor - Surface Mount ROHS", Manufacturer="Viking Tech", Package Size=0603, Power Rating=1/10W, Resistance="5.76kOhm +/-1%", Assembled?=no, Manufacturer Part Number=ARG03FTC5761
R9: library part RES-121K-0001, "121k Ohms ±1% 0.1W, 1/10W Chip Resistor 0603 (1608 Metric) Moisture Resistant Thick Film", Manufacturer=YAGEO, Package Size=0603, Power Rating=1/10W, Resistance="121kOhm +/- 1%", Assembled?=no, Manufacturer Part Number=RC0603FR-07121KL
R10: library part RES-165K-0001, "165k Ohms ±1% 0.1W, 1/10W Chip Resistor 0603 (1608 Metric) Moisture Resistant Thick Film", Manufacturer=YAGEO, Package Size=0603, Power Rating=1/10W, Resistance="165kOhm +/-1%", Assembled?=no, Manufacturer Part Number=RC0603FR-07165KL
R11: library part RES-240K-0001, "240k Ohms ±1% 0.1W, 1/10W Chip Resistor 0603 (1608 Metric) Moisture Resistant Thick Film", Manufacturer=YAGEO, Package Size=0603, Power Rating=1/10W, Resistance="240kOhm +/-1%", Assembled?=no, Manufacturer Part Number=RC0603FR-07240KL
R12: library part RES-5.6K-0001, "5.6 kOhms ±1% 0.063W, 1/16W Chip Resistor 0402 (1005 Metric) Automotive AEC-Q200, Moisture Resistant Thick Film", Manufacturer=YAGEO, Package Size=0402, Power Rating=1/16W, Resistance="5.6kOhm +/-1%", Assembled?=no, Manufacturer Part Number=AC0402FR-075K6L
R13 R35 R36 R39 R40 R46 R50 R51 R52 R55 R56 R59 R60: library part RES-10K-0002, "RES SMD 10K OHM 1% 1/10W 0603", Manufacturer=YAGEO, Package Size=0603, Power Rating=1/10W, Resistance="10kOhm +/-1%", Assembled?=no, Manufacturer Part Number=RC0603FR-0710KP
R17: library part RES-78.7K-0001, "78.7 kOhms ±1% 0.063W, 1/16W Chip Resistor 0402 (1005 Metric) Automotive AEC-Q200 Thick Film", Power="1/16 W", Resistance="78.7k +/-1%"
R20: library part RES-75K-0001, "75 kOhms ±5% 0.063W, 1/16W Chip Resistor 0402 (1005 Metric) Automotive AEC-Q200 Thick Film", Power=1/16W, Resistance="75K +/- 5%"
R22: library part RES-2K-0001, "2 kOhms ±1% 0.063W, 1/16W Chip Resistor 0402 (1005 Metric) Thick Film", Power="1/16 W", Resistance="2K +/- 1%"
R26 R27 R29 R30 R42 R43 R44 R45 R61 R62 R65 R66: library part RES-100-0002, "RESISTOR SMD", Manufacturer=YAGEO, Package Size=0603, Power Rating=1/10W, Resistance="100Ohm +/-1%", Assembled?=no, Manufacturer Part Number=AC0603FR-10100RL
R28 R63 R64: library part RES-1M-0001, "1 MOhms ±1% 0.1W, 1/10W Chip Resistor 0603 (1608 Metric) Automotive AEC-Q200 Thick Film", Package Size=0603, Power="1/10 W", Resistance="1 MOhm"
R31 R32 R73 R74 R75 R76 R88 R89 R90 R91: library part RES-4.7K-0002, "RES SMD 4.7K OHM 1% 1/10W 0603", Manufacturer=YAGEO, Package Size=0603, Power Rating=1/10W, Resistance="4.7kOhm +/-1%", Assembled?=no, Manufacturer Part Number=AF0603FR-074K7L
R33 R34 R37 R38 R41 R47 R48 R49 R53 R54 R57 R58: library part RES-33-0002, "RES SMD 33 OHM 1% 1/10W 0603", Manufacturer=YAGEO, Package Size=0603, Power Rating=1/10W, Resistance="33Ohm +/-1%", Assembled?=no, Manufacturer Part Number=RC0603FR-0733RP
R67 R68 R80 R81 R82 R83 R84 R85 R86 R87 R92 R93 R94 R95 R96 R97 R98 R99 R100 R101 R102 R103 R104 R105 R106 R107: library part RES-0-0001, "0 Ohms Jumper 0.1W, 1/10W Chip Resistor 0603 (1608 Metric) Automotive AEC-Q200 Thick Film", Package Size=0603, Power="1/10 W", Resistance="0 Ohm"
R69: library part RES-7K-0001, "7.15 kOhms ±1% 0.063W, 1/16W Chip Resistor 0402 (1005 Metric) Automotive AEC-Q200 Thick Film", Power="1/16 W", Resistance="7.15K +/- 1%"
R78: library part RES-33-0001, "RES SMD 33 OHM 5% 1/16W 0402", Manufacturer=YAGEO, Package Size=0402, Power Rating=1/16W, Resistance="33Ohm +/-5%", Assembled?=no, Manufacturer Part Number=RC0402JR-0733RP
R79: library part RES-44.2K-0001, "44.2 kOhms ±1% 0.1W, 1/10W Chip Resistor 0603 (1608 Metric) Automotive AEC-Q200 Thick Film", Power="1/10 W", Resistance="44.2k +/- 1%"
U1 U2 U3: library part IC-STM32F100-0001, "ARM® Cortex®-M3 STM32F1 Microcontroller IC 32-Bit Single-Core 24MHz 128KB (128K x 8) FLASH 100-LQFP (14x14)", Package Size=100-LQFP, Manufacturer Part Number=STM32F100VBT7B, VCC="2 ~ 3.6V"
X1: library part HEADER_POS2_?43045-0200, Package=43045-0200, DeviceName=43045-0200, DeviceSetName=HEADER_POS2_?, GateName_1=G$1, LibraryName=con-molex-micro-fit-3_0_2, SymbolName_1=HEADER_POS2
X2: library part HEADER_POS12_?44764-1201, Package=44764-1201, DeviceName=44764-1201, DeviceSetName=HEADER_POS12_?, GateName_1=G$1, LibraryName=con-molex-micro-fit-3_0_2, SymbolName_1=HEADER_POS12
Y1 Y2 Y3: library part CRYSTAL-24MHz-0001, "24 MHz ±7ppm Crystal 6pF 50 Ohms 4-SMD, No Lead", Equavalence Series Resistance="50 Ohm", Frequency="24 MHZ", Frequency Tolerance="+/- 7 ppm", Load Capacitance="6 pF", Manufacturer="ECS Inc.", Package Size=4-SMD, Manufacturer Part Number=ECS-240-6-37B-7KM-TR

## Free pads (board coordinates)
  round 300 hole 180: ""(500,1250) ""(500,5500) ""(11500,1250) ""(11500,5500)

## Via types
v1: diameter 20, hole 10, Top Layer to Bottom Layer, 7 vias

## Nets (pads, with @x,y where several pads share a name; then routed paths per layer and width w, separated by ;. In a path a pad name is that pad's centre, name@x,y a point inside that pad or via, vN(x,y) a via of type N, cw(c..) or ccw(c..) an arc to the next point about the centre after c; other vN are vias at no path point)
3.3V: C60.1 C61.1 C63.1 C64.1 C113.1 C114.1 C115.1 C116.1 R31.2 R32.2 R73.1 R74.1 R75.2 R76.2 R88.1 R89.1 R90.2 R91.1 U1.6 U1.11 U1.21 U1.22 U1.28 U1.50 U1.75 U1.100 U2.6 U2.11 U2.21 U2.22 U2.28 U2.50 U2.75 U2.100 U3.6 U3.11 U3.21 U3.22 U3.28 U3.50 U3.75 U3.100
3.3V_Main: C1.1 C2.1 C3.1 C47.1 C48.1 C49.1 C50.1 C51.1 C52.1 C56.1 C58.1 I1.1 I3.3 I3.4 I4.8 I6.8 I7.1 I8.1
5V_Main: C17.1 C18.1 C19.1 C20.1 C21.1 C22.1 C41.1 C42.1 C43.1 C44.1 C45.1 I2.2 I4.3 I4.4 Q2.3 Q3.3 Q8.3 R2.1 R3.1 R18.1 R72.1
5V_Out: C24.1 I5.1 I6.1 I6.2 L1.2 R13.1
12V_MAIN: C33.1 C34.1 C35.1 C36.1 C37.1 C39.1 I6.3 I6.4
12V_Out: C38.1 I4.1 I4.2 I5.9 L2.2 R14.1
BAT_Main: C4.1 C5.1 C6.1 C7.1 C8.1 C9.1 C10.1 C11.1 C12.1 C13.1 C14.1 C28.1 C29.1 C30.1 C31.1 C32.1 D1.1 F1.1 F2.1 F3.1 F4.1 F5.1 F6.1 F7.1 I5.22 L4.1 L4.2 Q4.3 Q6.3 R1.1@15513.5,5640 R15.1 R16.1 X1.P$2
COMP1: C40.1 I5.30 R17.1
COMP2: C119.1 I5.12 R20.1
CS1+: C24.2 I5.32 R8.2
CS2+: C38.2 I5.10 R12.2
Debug_LED0: R42.1 U3.90
Debug_LED1: R43.1 U3.89
Debug_LED2: R44.1 U3.88
Debug_LED3: R45.1 U3.87
Debug_LED4: R61.1 U2.90
Debug_LED5: R62.1 U2.89
Debug_LED6: R65.1 U2.88
Debug_LED7: R66.1 U2.87
Debug_LED8: R26.1 U1.91
Debug_LED9: R27.1 U1.90
Debug_LED10: R29.1 U1.88
Debug_LED11: R30.1 U1.87
EN1: I5.7 R15.2 R70.1
EN2: I5.8 R16.2 R71.1
EN_3.3V: I2.5 R18.2 R19.1 | length 90.4
  Top Layer w10: I2.5@1270,1366.22 1270,1365 1280,1355 R18.2 R19.1
FB1: I5.31 R13.2 R22.1
FB2: I5.11 R14.2 R69.1
FB_3.3V: C53.1 I2.8 R21.2 R79.1
GND: C1.2 C2.2 C3.2 C4.2 C5.2 C6.2 C7.2 C8.2 C9.2 C10.2 C11.2 C12.2 C13.2 C14.2 C15.1 C16.1 C17.2 C18.2 C19.2 C20.2 C21.2 C22.2 C23.2 C25.1 C28.2 C29.2 C30.2 C31.2 C32.2 C33.2 C34.2 C35.2 C36.2 C37.2 C39.2 C40.2 C41.2 C42.2 C43.2 C44.2 C45.2 C46.2 C47.2 C48.2 C49.2 C50.2 C51.2 C52.2 C54.2 C55.2 C56.2 C57.2 C58.2 C59.2 C60.2 C61.2 C62.2 C63.2 C64.2 C65.2 C66.2 C67.2 C68.2 C69.2 C70.2 C71.2 C72.2 C73.2 C74.2 C75.2 C76.2 C77.2 C78.2 C79.2 C80.2 C81.2 C82.2 C83.2 C84.2 C85.2 C86.2 C87.2 C88.2 C89.2 C90.2 C91.2 C92.2 C93.2 C94.2 C95.2 C96.2 C97.2 C98.2 C99.2 C100.2 C101.2 C102.2 C103.2 C104.2 C105.2 C106.2 C107.2 C108.2 C109.2 C110.2 C111.2 C112.2 C113.2 C114.2 C115.2 C116.2 C117.2 C118.2 C119.2 C120.2 C121.2 D1.2 D2.2 D3.2 D4.2 D5.2 D6.2 D7.2 D8.2 D9.2 D10.2 D11.2 D12.2 D13.2 D14.2 D15.2 D16.2 I1.3 I2.4 I3.5 I3.6 I5.4 I5.6 I5.21 I7.3 I8.3 Q1.3 Q5.2 Q7.2 Q9.2 Q10.2 Q11.2 Q12.2 Q13.2 Q14.2 Q15.2 Q16.2 Q17.2 Q18.2 Q19.2 Q20.2 R1.2@15189.68,5650 R9.1 R10.1 R11.1 R19.2 R22.2 R69.2 R70.2 R71.2 R79.2 U1.10 U1.19 U1.20 U1.27 U1.49 U1.74 U1.99 U2.10 U2.19 U2.20 U2.27 U2.49 U2.74 U2.99 U3.10 U3.19 U3.20 U3.27 U3.49 U3.74 U3.99 Y1.2 Y2.2 Y3.2 | length 2155
  Top Layer w10: D4.2 820,1207.6 840,1187.6 840,1140 860,1120 C44.2 937.99,1117.01 C43.2 1010,1116.02 1049.29,1076.73 1110,1076.73 C42.2@1115,1081.73 ; C52.2 1096.65,818.5 1116.22,838.07 1116.22,838.19 1123.03,845 C51.2 1126.97,845 1134.33,837.64 1163.35,837.64 1180,820.98 C50.2 1215,820 1230.63,804.37 1230.63,789.61 1250.24,770 C49.2 C48.2 ; C42.2 C41.2 v1(1255,1075) ; R79.2 v1(1230,1655) ; I2.4 1269.68,1245.32 v1(1280,1235) ; C46.2 1294.68,1394.68 1354.68,1394.68 R19.2 v1(1355,1435.91) ; v1(1360,815) C48.2 ; C54.2 1783.81,1292.01 1764.99,1273.19 1759.53,1273.19 1746.97,1260.63 C55.2 1742.18,1257.82 1683.29,1257.82 I3.6 I3.5 1680.47,1049.69 1665.79,1035 C47.2 1660,1033.15 1660,898.28 1531.72,770 C48.2
  Bottom Layer w10: v1@1355,1435 v1(1355,1435.91)
LX1: C15.2 C23.1 C26.1 C27.1 I5.5 I5.19 I5.20
Mos0_out: C66.1 C67.1 Q9.3 X2.P$1
Mos1_out: C70.1 C71.1 Q11.3 X2.P$2
Mos2_out: C76.1 C77.1 Q14.3 X2.P$3
Mos3_out: C82.1 C83.1 Q17.3 X2.P$4
Mos4_out: C86.1 C87.1 Q19.3 X2.P$5
Mos5_out: C68.1 C69.1 Q10.3 X2.P$6
Mos6_out: C72.1 C73.1 Q12.3 X2.P$7
Mos7_out: C78.1 C79.1 Q15.3 X2.P$8
Mos8_out: C84.1 C85.1 Q18.3 X2.P$9
Mos9_out: C88.1 C89.1 Q20.3 X2.P$10
Mos10_out: C74.1 C75.1 Q13.3 X2.P$11
Mos11_out: C80.1 C81.1 Q16.3 X2.P$12
NetC26_2: C26.2 I5.24
NetC27_2: C27.2 I5.17
NetC55_1: C55.1 I3.7 U1.26 | length 66.6
  Top Layer w10: I3.7 1682.97,1302.5 1742.5,1302.5 C55.1
NetC57_1: C57.1 I4.6 U1.30
NetC59_1: C59.1 I6.6 U1.29
NetC62_1: C62.1 R28.1 R80.2 Y1.1
NetC90_1: C90.1 C91.1 C92.1 F1.2
NetC93_1: C93.1 C94.1 C95.1 F2.2
NetC96_1: C96.1 C97.1 C98.1 F3.2
NetC99_1: C99.1 C100.1 C101.1 F4.2
NetC102_1: C102.1 C103.1 C104.1 F5.2
NetC105_1: C105.1 C106.1 C107.1 F6.2
NetC108_1: C108.1 C109.1 C110.1 F7.2
NetC117_1: C117.1 R63.2 R86.2 Y2.3
NetC118_1: C118.1 R64.2 R87.2 Y3.3
NetC120_1: C120.1 R17.2
NetC121_1: C121.1 R20.2
NetD2_1: D2.1 R6.2
NetD3_1: D3.1 R7.2
NetD4_1: D4.1 R78.2 | length 101.2
  Top Layer w10: D4.1 821.5,1390 R78.2
NetD5_1: D5.1 R26.2
NetD6_1: D6.1 R27.2
NetD7_1: D7.1 R29.2
NetD8_1: D8.1 R30.2
NetD9_1: D9.1 R42.2
NetD10_1: D10.1 R43.2
NetD11_1: D11.1 R44.2
NetD12_1: D12.1 R45.2
NetD13_1: D13.1 R61.2
NetD14_1: D14.1 R62.2
NetD15_1: D15.1 R65.2
NetD16_1: D16.1 R66.2
NetI1_2: I1.2 U1.33
NetI5_2: I5.2 R11.2
NetI5_3: I5.3 R10.2
NetI5_15: I5.15 Q6.1
NetI5_16: I5.16 L2.1 Q6.2 Q7.3 R12.1
NetI5_18: I5.18 Q7.1
NetI5_23: I5.23 L1.1 Q4.2 Q5.3 R8.1
NetI5_25: I5.25 Q5.1
NetI5_26: I5.26 Q4.1
NetI5_28: I5.28 R9.2
NetI7_2: I7.2 U1.32
NetI8_2: I8.2 U1.31
NetQ1_1: Q1.1 R1.1@15150.32,5650 R1.2@15576.5,5640
NetQ1_2: Q1.2 X1.P$1
NetQ2_1: Q2.1 R2.2 R4.2
NetQ2_2: Q2.2 R6.1
NetQ3_1: Q3.1 R3.2 R5.2
NetQ3_2: Q3.2 R7.1
NetQ8_1: Q8.1 R72.2 R77.2 | length 150.6
  Top Layer w10: Q8.1 960.16,1269.84 1009.84,1269.84 R72.2 1010.16,1269.84 1110.16,1269.84 R77.2
NetQ8_2: Q8.2 R78.1 | length 45.2
  Top Layer w10: Q8.2 R78.1
NetQ9_1: Q9.1 R35.1
NetQ10_1: Q10.1 R36.1
NetQ11_1: Q11.1 R39.1
NetQ12_1: Q12.1 R40.1
NetQ13_1: Q13.1 R46.1
NetQ14_1: Q14.1 R50.1
NetQ15_1: Q15.1 R51.1
NetQ16_1: Q16.1 R52.1
NetQ17_1: Q17.1 R55.1
NetQ18_1: Q18.1 R56.1
NetQ19_1: Q19.1 R59.1
NetQ20_1: Q20.1 R60.1
NetR23_1: R23.1 R24.1 R25.1
NetR31_1: R31.1 R81.2
NetR32_1: R32.1 R82.1
NetR33_1: R33.1 U1.51
NetR34_1: R34.1 U1.56
NetR37_1: R37.1 U1.52
NetR38_1: R38.1 U1.57
NetR41_1: R41.1 U1.61
NetR47_1: R47.1 U1.53
NetR48_1: R48.1 U1.58
NetR49_1: R49.1 U1.62
NetR53_1: R53.1 U1.54
NetR54_1: R54.1 U1.59
NetR57_1: R57.1 U1.55
NetR58_1: R58.1 U1.60
NetR73_2: R73.2 R107.2
NetR74_2: R74.2 R106.1
NetR75_1: R75.1 R104.1
NetR76_1: R76.1 R105.1
NetR81_1: R81.1 U1.93
NetR82_2: R82.2 U1.92
NetR83_1: R83.1 U1.76
NetR83_2: R83.2
NetR84_1: R84.1 U1.69
NetR84_2: R84.2
NetR85_1: R85.1 U1.68
NetR85_2: R85.2
NetR88_2: R88.2 R93.2
NetR89_2: R89.2 R92.2
NetR90_1: R90.1 R96.2
NetR91_2: R91.2 R95.2
NetR94_1: R94.1 U3.92
NetR94_2: R94.2
NetR97_1: R97.1 U2.93
NetR97_2: R97.2
NetR98_1: R98.1 U3.76
NetR98_2: R98.2
NetR99_1: R99.1 U3.93
NetR99_2: R99.2
NetR100_1: R100.1 U2.92
NetR100_2: R100.2
NetR101_1: R101.1 U2.76
NetR101_2: R101.2
NetR102_1: R102.1 U2.72
NetR102_2: R102.2
NetR103_1: R103.1 U3.72
NetR103_2: R103.2
NetR104_2: R104.2 U2.48
NetR105_2: R105.2 U3.48
NetR106_2: R106.2 U3.47
NetR107_1: R107.1 U2.47
NetU1_40: U1.40
NetU1_42: U1.42
NetU1_44: U1.44
NetU1_72: U1.72
NetU2_23: U2.23
NetU2_24: U2.24
NetU2_25: U2.25
NetU2_26: U2.26
NetU2_29: U2.29
NetU2_30: U2.30
NetU2_31: U2.31
NetU2_32: U2.32
NetU2_33: U2.33
NetU2_34: U2.34
NetU2_35: U2.35
NetU2_36: U2.36
NetU2_37: U2.37
NetU2_38: U2.38
NetU2_40: U2.40
NetU2_42: U2.42
NetU2_51: U2.51 U3.29
NetU2_52: U2.52 U3.30
NetU2_53: U2.53 U3.33
NetU2_54: U2.54 U3.34
NetU2_55: U2.55
NetU2_56: U2.56
NetU2_57: U2.57
NetU2_58: U2.58
NetU2_59: U2.59 U3.25
NetU2_60: U2.60 U3.26
NetU2_61: U2.61
NetU2_62: U2.62
NetU2_63: U2.63 U3.35
NetU2_64: U2.64 U3.36
NetU2_65: U2.65 U3.37
NetU2_66: U2.66 U3.38
NetU2_67: U2.67
NetU2_68: U2.68
NetU2_69: U2.69
NetU2_70: U2.70
NetU3_23: U3.23
NetU3_24: U3.24
NetU3_31: U3.31
NetU3_32: U3.32
NetU3_40: U3.40
NetU3_42: U3.42
NetU3_51: U3.51
NetU3_52: U3.52
NetU3_53: U3.53
NetU3_54: U3.54
NetU3_55: U3.55
NetU3_56: U3.56
NetU3_57: U3.57
NetU3_58: U3.58
NetU3_59: U3.59
NetU3_60: U3.60
NetU3_61: U3.61
NetU3_62: U3.62
NetU3_63: U3.63
NetU3_64: U3.64
NetU3_65: U3.65
NetU3_66: U3.66
NetU3_67: U3.67
NetU3_68: U3.68
NetU3_69: U3.69
NetU3_70: U3.70
OSC_IN: R80.1 U1.12
OSC_IN_0: C111.1 R63.1 U3.12 Y2.1
OSC_IN_1: C112.1 R64.1 U2.12 Y3.1
OSC_OUT: C65.1 R28.2 U1.13 Y1.3
OSC_OUT_0: R86.1 U3.13
OSC_OUT_1: R87.1 U2.13
OUT_3.3V: C53.2 C54.1 I2.7 I3.1 I3.2 I3.8 L3.2 R21.1
PG_3.3V: I2.1 R77.1 | length 86.9
  Top Layer w10: R77.1 1204.14,1270 1210,1275.86 I2.1@1210,1300
PGOOD1: I5.27 R5.1
PGOOD2: I5.14 R4.1
SCL0: R68.1 R95.1 U3.95
SCL1: R68.2 R96.1 U2.95
SDA0: R67.1 R93.1 U3.96
SDA1: R67.2 R92.1 U2.96
SS1: C16.2 I5.29
SS2: C25.2 I5.13
SS_3.3V: C46.1 I2.6 | length 42.1
  Top Layer w10: I2.6 1250,1390 C46.1
SW_3.3V: I2.3 L3.1 | length 413.6
  Top Layer w5: v1(1235,1235) 1240,1235 1240,1235.43 1242.5,1237.93 1242.5,1250.53 1250,1258.03 I2.3
  Top Layer w10: v1(1305,1435) 1305,1496.02 1306.46,1497.48 L3.1
  Bottom Layer w10: v1(1235,1235) 1240,1235 1240,1397.29 1277.71,1435 v1(1305,1435)
Therm0: R23.2 U1.23
Therm1: R24.2 U1.24
Therm2: R25.2 U1.25